# EAGLE board opemGBZ (EAGLE 9.1.0)
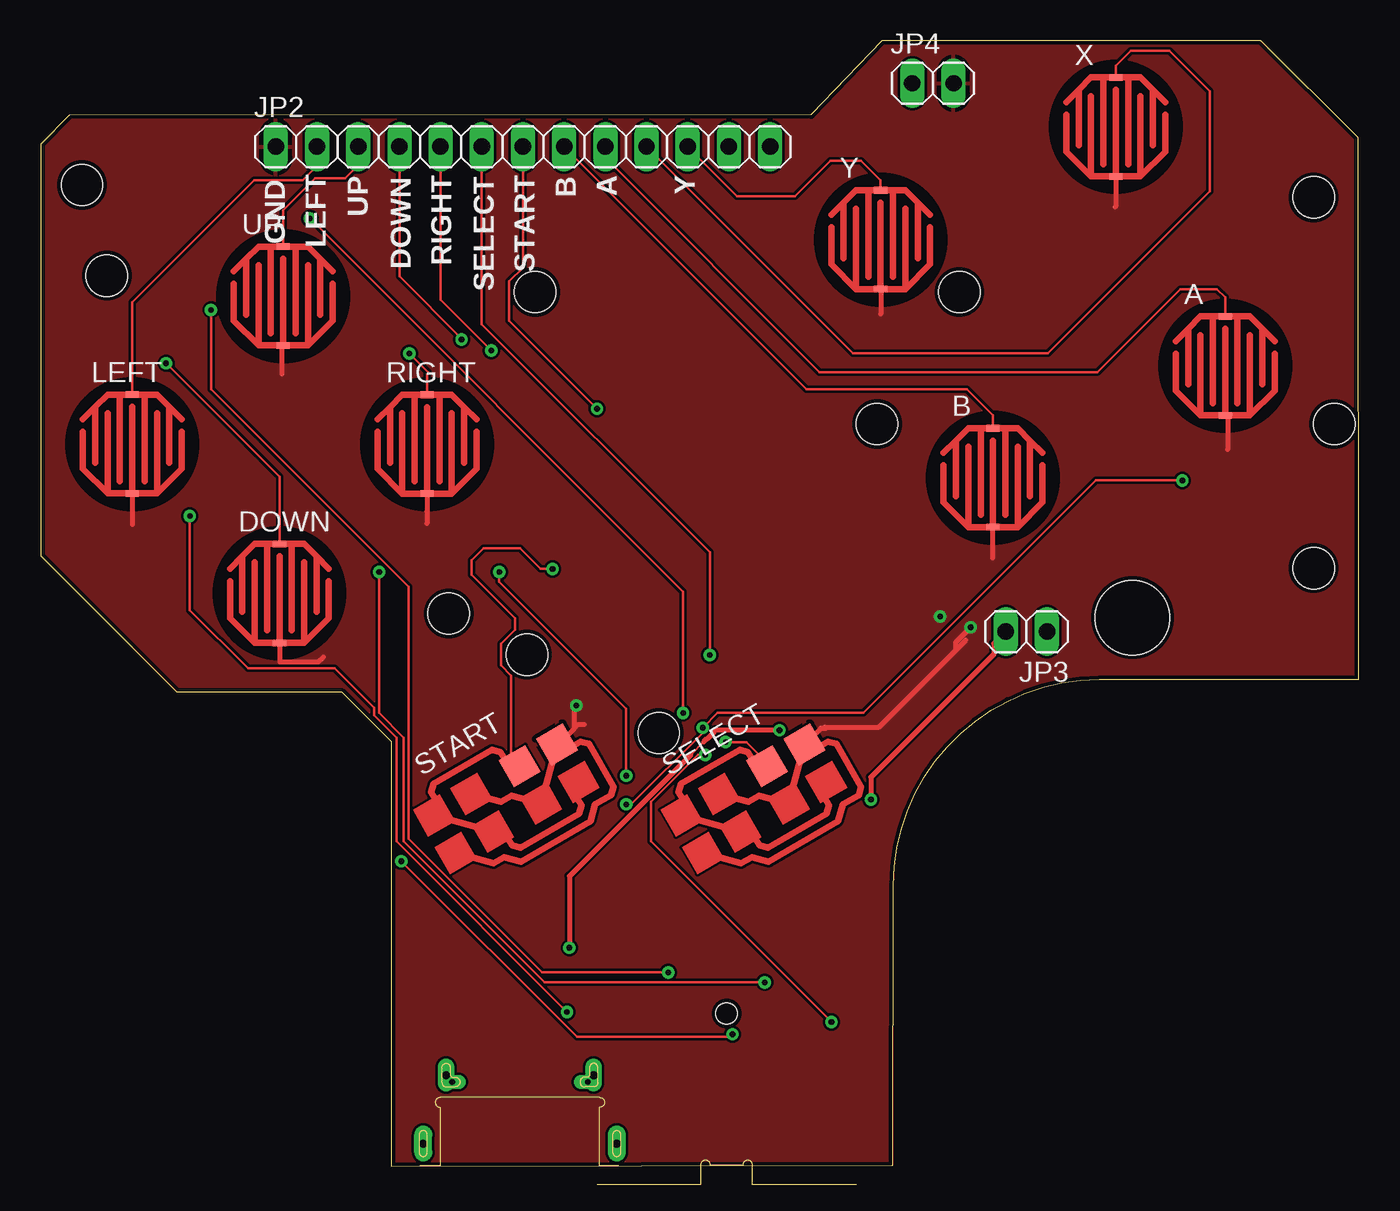
[diagram p0: board, top side]
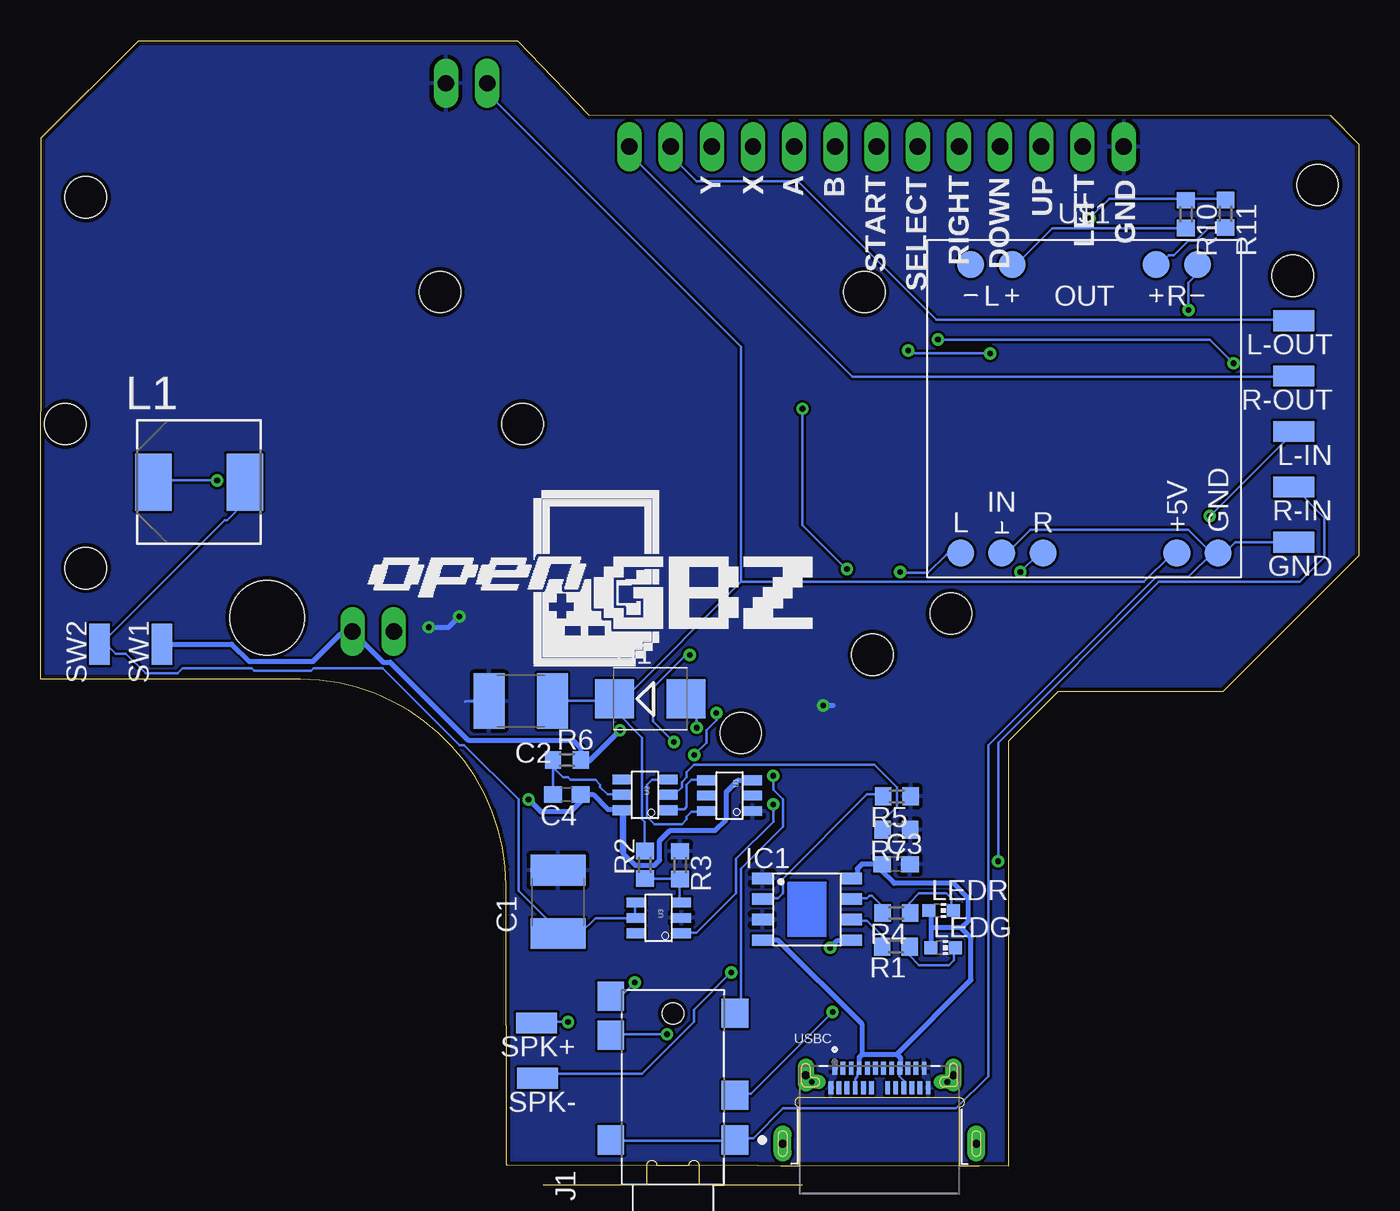
[diagram p1: board, bottom side, seen from below]

Size 81.3 x 69.38 mm. Coordinates in mm from the lower left corner, seen from the top.
Outline: 75.24,69.38 51.89,69.37 47.52,64.8 1.78,64.77 0,62.99 0.02,37.62 8.4,29.24 18.56,29.24 21.61,26.19 21.61,14.13 21.61,14.02 21.62,0 52.51,0.05 52.57,0.05 52.6,17.26 52.6,17.3 arc-90 65.3,30 81.3,30 81.26,63.03 81.26,63.05 81.26,63.3 81.26,63.3 81.26,63.36 81.25,63.37 81.25,63.37 75.24,69.38
Copper layers (1*16): Top 0.035mm / dielectric 1.5mm / Bottom 0.035mm
Design rules "default *": minimum track width 6mil, minimum drill 0.35mm, track to track 6mil, track to pad 6mil, pad to pad 6mil, via to via 6mil, smd to smd 6mil, copper to edge 10mil, drill to drill 6mil, minimum pad ring 10mil, minimum via ring 8mil, stop-mask expansion 4mil, vias tented up to drill 0mil, thermal gap 10mil
Holes 4.57 mm at 67.33,33.81
Holes 2.54 mm at 2.56,60.48 78.5,59.72 78.5,36.86 30.5,53.87 56.66,53.87 29.99,31.52 51.58,45.75 25.16,34.06 38.12,26.7 79.77,45.75 4.08,54.89

## Footprints (pad centres in the part's own frame; a part is rotated, then mirrored left to right if it is on the bottom)
DMG-BTN = smd 0.813 x 0.406: P$1 0,-3.048; P$2 0,3.048
C1812 = smd 1.9 x 3.4: 1 -1.95,0; 2 1.95,0
C0603 = smd 1.1 x 1: 1 -0.85,0; 2 0.85,0
SMB = smd 2.4 x 2.4: A 2.2,0; C -2.2,0
SMD1,27-2,54 = smd 1.27 x 2.54: 1 0,0
SOP-8 = smd 1.3 x 0.7: 1 -2.75,1.905; 2 -2.75,0.635; 3 -2.75,-0.635; 4 -2.75,-1.905; 5 2.75,-1.905; 6 2.75,-0.635; 7 2.75,0.635; 8 2.75,1.905
CUI_SJ2-35954D-SMT-TR = smd 1.8 x 1.65: 1 -3.25,-3.825; 2 3.2,3.825; 3 -0.5,-3.825; 4 -3.25,3.825; 10 5.6,3.825; 11 4.55,-3.825 | hole 1.3: 4.55,0
1X13 = drill 1.016 long: 1 -15.24,0; 2 -12.7,0; 3 -10.16,0; 4 -7.62,0; 5 -5.08,0; 6 -2.54,0; 7 0,0; 8 2.54,0; 9 5.08,0; 10 7.62,0; 11 10.16,0; 12 12.7,0; 13 15.24,0
1X02 = drill 1.016 long: 1 -1.27,0; 2 1.27,0
INDM7676X435N = smd 2.261 x 3.505: 1 -2.819,0; 2 2.819,0
CHIP-LED0603 = smd 0.8 x 0.8: A 0,-0.75; C 0,0.75
R0603 = smd 1 x 1.1: 1 -0.85,0; 2 0.85,0
DMG-SEL = smd 1.905 x 1.905: P$1 1.714,1.333; P$2 4.381,1.333
SOT23-6 = smd 0.6 x 1.2: 1 -0.95,-1.4; 2 0,-1.4; 3 0.95,-1.4; 4 0.95,1.4; 5 0,1.4; 6 -0.95,1.4
AMPLIFIER-PAM8403 = smd 1.676 x 1.676: +5V 5.715,-8.89; GND 8.255,-8.89; IN.COM -5.08,-8.89; IN.L -7.62,-8.89; IN.R -2.54,-8.89; OUT.L+ -4.445,8.89; OUT.L- -6.985,8.89; OUT.R+ 4.445,8.89; OUT.R- 6.985,8.89
TE_1-2295018-2 = smd 0.3 x 0.8: A1 -2.75,4.63; A2 -2.25,4.63; A3 -1.75,4.63; A4 -1.25,4.63; A5 -0.75,4.63; A6 -0.25,4.63; A7 0.25,4.63; A8 0.75,4.63; A9 1.25,4.63; A10 1.75,4.63; A11 2.25,4.63; A12 2.75,4.63; B1 3,3.43; B2 2.5,3.43; B3 2,3.43; B4 1.5,3.43; B5 1,3.43; B6 0.5,3.43; B7 -0.5,3.43; B8 -1,3.43; B9 -1.5,3.43; B10 -2,3.43; B11 -2.5,3.43; B12 -3,3.43 | drill 0.5 long: P1_1 -4.55,4.22; P2_1 4.55,4.22 | drill 0.35 long: P1_2 -4.191,3.795; P2_2 4.191,3.795 | drill 0.5 pad 1.1 long: P4 -5.97,0; P5 5.97,0

## Placement (x,y rotation side)
A  DMG-BTN  [DMG-BTN]  73.05,49.32 0 top
B  DMG-BTN  [DMG-BTN]  58.73,42.43 0 top
C1  22uF  [C1812]  49.4,16.28 90 bottom
C2  22uF  [C1812]  51.68,28.67 180 bottom
C3  10u  [C0603]  28.55,18.61 0 bottom
C4  0.1uF  [C0603]  48.85,22.91 180 bottom
D1  [SMB]  43.7,28.8 0 bottom
DOWN  DMG-BTN  [DMG-BTN]  14.73,35.3 0 top
GND  [SMD1,27-2,54]  4.02,38.45 90 bottom
IC1  TP4056  [SOP-8]  34.03,15.83 0 bottom
J1  SJ2-35954D-SMT-TR  [CUI_SJ2-35954D-SMT-TR]  42.3,4.86 90 bottom
JP2  [1X13]  29.75,62.84 0 top
JP3  [1X02]  60.8,32.94 180 top
JP4  [1X02]  55.02,66.75 0 top
L1  DR74-220-R  [INDM7676X435N]  71.52,42.16 0 bottom
L-IN  [SMD1,27-2,54]  4.02,45.28 90 bottom
L-OUT  [SMD1,27-2,54]  4.02,52.11 90 bottom
LEDG  [CHIP-LED0603]  25.64,13.47 270 bottom
LEDR  [CHIP-LED0603]  25.76,15.75 270 bottom
LEFT  DMG-BTN  [DMG-BTN]  5.66,44.51 0 top
R1  1k  [R0603]  28.55,13.53 180 bottom
R2  [R0603]  44.03,18.58 90 bottom
R3  [R0603]  41.86,18.55 270 bottom
R4  1k  [R0603]  28.52,15.6 180 bottom
R5  2k  [R0603]  28.49,22.79 180 bottom
R6  100  [R0603]  48.84,25.03 0 bottom
R7  2k  [R0603]  28.52,20.72 180 bottom
R10  16  [R0603]  10.67,58.68 270 bottom
R11  16  [R0603]  8.23,58.7 270 bottom
R-IN  [SMD1,27-2,54]  4.02,41.87 90 bottom
R-OUT  [SMD1,27-2,54]  4.02,48.69 90 bottom
RIGHT  DMG-BTN  [DMG-BTN]  23.83,44.5 0 top
SELECT  DMG-BTN  [DMG-SEL]  43.98,22.64 30 top
SPK+  [SMD1,27-2,54]  50.72,8.82 90 bottom
SPK-  [SMD1,27-2,54]  50.66,5.41 90 bottom
START  DMG-BTN  [DMG-SEL]  28.72,22.64 30 top
SW1  [SMD1,27-2,54]  73.82,32.17 0 bottom
SW2  [SMD1,27-2,54]  77.66,32.17 0 bottom
U1  FS8205  [SOT23-6]  38.81,22.84 270 bottom
U2  FS312F-G  [SOT23-6]  44.03,22.89 90 bottom
U3  MT3608  [SOT23-6]  43.18,15.3 90 bottom
U$1  AMPLIFIER-PAM8403  [AMPLIFIER-PAM8403]  16.95,46.68 0 bottom
UP  DMG-BTN  [DMG-BTN]  14.96,53.63 0 top
USBC  1-2295018-2  [TE_1-2295018-2]  29.56,1.39 0 bottom
X  DMG-BTN  [DMG-BTN]  66.3,64.05 0 top
Y  DMG-BTN  [DMG-BTN]  51.8,57.11 0 top

## Library data of the parts
A B DOWN LEFT RIGHT SELECT START UP X Y = Game Boy
C1-C4 = rcl; SPICEPREFIX: C
D1 = diode
GND L-IN L-OUT R-IN R-OUT SPK+ SPK- SW1 SW2 = wirepad
IC1 = TP4056
J1 = SJ2-35954D-SMT-TR; AVAILABILITY: Good; DESCRIPTION: 4 conductors, 3.5mm, SMT Audio Jack w/ 2 Switch; MF: CUI; MP: SJ2-35954D-SMT-TR; PACKAGE: None; PRICE: 0.94 USD
JP2-JP4 = pinhead
L1 = DR74-220-R; AVAILABILITY: Good; DESCRIPTION: Inductor Power Shielded Drum Core 21.73uH/22uH 20% 100KHz Ferrite 1.75A 92.5mOhm DCR T/R; MF: Eaton; MP: DR74-220-R; PACKAGE: Nonstandard Eaton; PRICE: 0.98 USD
LEDG LEDR = led
R1-R7 R10 R11 = rcl; SPICEPREFIX: R
U1 = fs8205
U2 = fs321f-g
U3 = mt3608
U$1 = diy-modules
USBC = 1-2295018-2; AVAILABILITY: Good; CENTERLINE_PITCH: .5 mm[.019 in]; COMMENT: 1-2295018-2; DESCRIPTION: USB TYPE C, REC OFFSET 0.65MM DUAL SMT; MF: TE Connectivity; MP: 1-2295018-2; NUMBER_OF_POSITIONS: 24; PACKAGE: None; PRICE: 1.82 USD; PRODUCT_TYPE: Connector

## Nets
5V: C2.1 D1.C JP4.1 R2.2 U$1.+5V
BAT+: IC1.5 JP3.1 R6.2 SW1.1
BAT-: C4.1 JP3.2 U1.6 U2.6
GND: A.P$1 B.P$1 C1.2 C2.2 C3.2 DOWN.P$1 IC1.1 IC1.3 JP2.1 JP4.2 LEFT.P$1 R3.1 R5.1 R7.1 RIGHT.P$1 SELECT.P$2 START.P$2 U1.4 U3.2 UP.P$1 USBC.A1 USBC.A12 USBC.B1 USBC.B12 X.P$1 Y.P$1
L-OUT: JP2.12 L-OUT.1
N$1: JP2.2 LEFT.P$2
N$2: JP2.3 UP.P$2
N$3: DOWN.P$2 JP2.4
N$4: JP2.5 RIGHT.P$2
N$5: JP2.6 SELECT.P$1
N$6: JP2.7 START.P$1
N$7: B.P$2 JP2.8
N$8: A.P$2 JP2.9
N$9: JP2.10 X.P$2
N$10: JP2.11 Y.P$2
N$11: IC1.6 R1.2
N$12: IC1.7 R4.2
N$13: LEDG.C R1.1
N$14: LEDR.C R4.1
N$15: IC1.2 R5.2
N$16: U1.3 U2.3
N$17: U1.1 U2.1
N$18: R7.2 U2.2
N$19: D1.A L1.1 U3.1
N$20: R2.1 R3.2 U3.3
N$21: R11.2 U$1.OUT.R+
N$22: GND.1 J1.1 J1.4 U$1.GND U$1.IN.COM
N$23: J1.11 U$1.IN.L
N$24: J1.10 U$1.IN.R
N$25: J1.2 R-IN.1
N$26: J1.3 L-IN.1
N$27: R10.2 U$1.OUT.L+
N$28: R10.1 R11.1 SPK+.1
N$29: SPK-.1 U$1.OUT.R-
N$30: C4.2 R6.1 U2.5
N$31: C1.1 L1.2 SW2.1 U3.4 U3.5
R-OUT: JP2.13 R-OUT.1
VBUS: C3.1 IC1.4 IC1.8 LEDG.A LEDR.A USBC.A4 USBC.A9 USBC.B4 USBC.B9

## Tracks (layer width: path | path; a pad name or v marks a point on that pad's centre or on a via)
5V
  Bottom 0.152: R2.2 44.04,19.55 44.04,21.23 44.19,21.38 44.19,26.41 45.87,28.09 45.87,28.7 D1.C | 38.1,36.01 13.26,36.01 11.58,37.69 11.28,37.69 U$1.+5V | 38.1,36.01 45.26,28.85 45.87,28.85 D1.C | 38.1,36.01 38.1,50.49 53.64,66.04 53.64,66.64 JP4.1 | C2.1 49.68,28.7 46.02,28.7 D1.C
BAT+  (via drill 0.35)
  Top 0.152: v32.61,13.46 32.61,17.88 40.09,25.36 40.89,26.15
  Top 0.305: v45.57,26.87 41.6,26.87 41.52,26.79 41.52,26.74 41.12,26.34 41.07,26.34 40.89,26.15 | 40.09,25.36 32.61,17.88 v32.61,13.46
  Bottom 0.152: 48,25.04 R6.2 47.92,24.96 | 31.39,13.91 IC1.5 | 62.79,32.81 62.18,32.81 JP3.1
  Bottom 0.305: SW1.1 69.5,32.17 68.44,31.12 64.48,31.12 62.79,32.81 | JP3.1 60.18,31.06 59.73,31.06 54.93,26.26 48.46,26.26 48,25.8 48,25.04 | v45.57,26.87 47.47,24.96 47.92,24.96 | v32.61,13.46 32.15,13.91 31.39,13.91
BAT-  (via drill 0.35)
  Top 0.305: JP3.2 58.78,32.2 58.78,31.55 51.2,23.97 v51.2,22.6
  Bottom 0.152: 46.33,21.99 45.57,21.99 U2.6 45.41,21.99 45.26,21.84 45.26,19.25 44.5,18.49 43.58,18.49 43.13,18.94 43.13,20.04
  Bottom 0.305: v51.2,22.6 50.44,21.84 48.61,21.84 48,22.46 C4.1 47.24,22.91 46.33,21.99 45.41,21.99 | U2.6 45.43,19.35 44.62,18.53 43.45,18.53 43.13,18.85 43.13,20.04 42.47,20.7 39.7,20.7 39.01,21.38 39.01,23.06 38.29,23.78 U1.6
GND  (via drill 0.35 pad 0.75)
  Top 0.305: DOWN.P$1 14.75,32.23 14.75,31.07 17.13,31.07 17.43,31.38 | RIGHT.P$1 23.83,40.34 23.83,39.61 | 23.83,39.61 | LEFT.P$1 5.66,39.56 5.67,39.55 | B.P$1 58.7,39.36 58.7,37.48 | A.P$1 73.21,46.11 73.21,44.18 | Y.P$1 51.81,52.53 | X.P$1 66.3,59.16 66.26,59.12 | UP.P$1 14.87,50.49 14.87,48.81 | SELECT.P$2 48.11,26.99 48.28,26.99 | 48.28,26.99 48.46,26.99 | 32.91,26.99 31.91,25.99 START.P$2 | 32.91,26.99 33.16,27.23 33.53,27.23 | 48.28,26.99 48.34,27.05 51.69,27.05 56.42,31.78 | 56.42,31.78 56.69,32.05 57.06,32.42 | v57.36,33.21 56.42,32.26 56.42,31.78 | 32.91,26.99 32.91,28.27 33.16,28.51 v33.04,28.39 | v33.04,28.39
  Bottom 0.152: C2.2 55.08,28.67 55.11,28.64
  Bottom 0.305: v57.36,33.21 56.14,33.21 v55.47,33.88 | v33.04,28.39 32.43,28.39
  pour Bottom: -3.72,73.26 76.81,73.26 86.81,63.26 86.81,12.36 67.05,-7.39 20.24,-7.39 12.13,0.72 12.13,16.14 -3.78,32.05 -3.78,73.26
  pour Top: 41.27,-5.99 63.58,-5.99 84.61,15.04 84.61,62.47 75.53,71.55 0.24,71.55 -2.26,69.05 -2.26,35.16 16.52,16.38 16.52,-0.44 22.19,-6.11 41.15,-6.11
L-OUT
  Bottom 0.152: L-OUT.1 4.11,52.17 26.06,52.17 34.59,60.7 40.84,60.7 42.37,62.23 42.37,62.83 JP2.12
N$1
  Top 0.152: LEFT.P$2 5.66,53.25 13.17,60.76 16.15,60.76 17.05,61.66 JP2.2
N$2
  Top 0.152: UP.P$2 14.96,58.9 16.95,60.88 18.77,60.88 19.59,61.7 JP2.3
N$3  (via drill 0.35 pad 0.75)
  Top 0.152: DOWN.P$2 14.73,42.49 v7.74,49.48 | JP2.4 22.13,54.85 26.03,50.95 v25.97,50.95
  Bottom 0.152: v25.97,50.95 9.2,50.95 v7.74,49.48
N$4  (via drill 0.35 pad 0.75)
  Top 0.152: JP2.5 24.67,53.41 v27.8,50.28 | v27.8,50.28 27.86,50.22 v27.8,50.28 | v22.74,50.09 23.89,48.94 23.89,48.88 23.83,48.81 RIGHT.P$2
  Bottom 0.152: v27.8,50.28 27.61,50.09 v22.74,50.09
N$5  (via drill 0.35 pad 0.75)
  Top 0.152: JP2.6 27.21,51.9 41.27,37.84 v41.27,31.5 | SELECT.P$1 44.8,24.86 43.52,26.14 v42.24,26.14
  Bottom 0.152: v42.24,26.14 43.52,27.42 43.52,29.49 41.52,31.5 v41.27,31.5
N$6  (via drill 0.35 pad 0.75)
  Top 0.152: JP2.7 29.75,55.38 28.9,54.54 28.9,52.1 v34.32,46.68 | v34.32,46.68 34.38,46.62 v34.32,46.68 | v31.58,36.8 30.84,36.8 29.56,38.09 27.31,38.09 26.58,37.35 26.58,36.44 29.26,33.76 29.26,33.05 28.39,32.18 28.39,30.86 29.02,30.23 29.02,25.18 START.P$1
  Bottom 0.152: v34.32,46.68 34.32,39.49 31.64,36.8 v31.58,36.8
N$7
  Top 0.152: JP2.8 47.22,47.9 57.12,47.9 58.73,46.28 B.P$2
N$8
  Top 0.152: JP2.9 34.83,62.14 48.03,48.94 65.16,48.94 70.29,54.06 72.54,54.06 73.05,53.55 A.P$2
N$9
  Top 0.152: JP2.10 50.11,50.09 62.12,50.09 72.11,60.09 72.11,66.25 69.61,68.75 67.24,68.75 66.3,67.81 X.P$2
N$10
  Top 0.152: JP2.11 42.95,59.79 46.51,59.79 48.71,61.98 50.6,61.98 51.8,60.77 Y.P$2
N$11
  Bottom 0.152: R1.2 29.41,13.61 29.41,14.22 30.33,15.13 31.24,15.13 IC1.6
N$12
  Bottom 0.152: R4.2 29.41,15.74 29.41,16.05 30.02,16.66 30.17,16.66 30.33,16.51 31.24,16.51 IC1.7
N$13
  Bottom 0.152: LEDG.C 24.99,13.46 24.99,12.7 25.3,12.39 27.13,12.39 27.74,13 27.74,13.46 R1.1
N$14
  Bottom 0.152: LEDR.C 25.14,15.9 25.14,16.51 25.45,16.81 27.13,16.81 27.74,16.2 27.74,15.74 R4.1
N$15
  Bottom 0.152: R5.2 29.41,22.91 30.33,22.91 35.51,17.72 35.51,16.81 35.81,16.51 36.73,16.51 IC1.2
N$16
  Bottom 0.152: U1.3 40.23,21.84 41.15,21.84 41.45,21.53 41.45,21.38 41.76,21.08 43.43,21.08 43.89,21.53 43.89,23.52 43.58,23.82 42.67,23.82 U2.3
N$17
  Bottom 0.152: U2.1 42.52,21.99 41.6,21.99 41.45,22.14 41.45,23.52 41.15,23.82 40.23,23.82 U1.1
N$18
  Bottom 0.152: R7.2 29.26,20.77 29.26,21.38 28.5,22.14 28.5,23.36 29.87,24.73 40.99,24.73 41.45,24.28 41.45,23.97 41.76,23.67 41.76,23.36 42.21,22.91 42.52,22.91 U2.2
N$19  (via drill 0.35)
  Top 0.152: v36.12,22.3 36.42,22.3 40.84,26.72 v40.84,27.02 41.76,27.94 50.75,27.94 65.07,42.26 v70.41,42.26
  Bottom 0.152: v36.12,22.3 36.12,21.23 38.4,18.94 38.4,16.81 40.84,14.37 41.76,14.37 U3.1 | v40.84,27.02 40.84,28.09 41.45,28.7 D1.A | v70.41,42.26 74.22,42.26 L1.1
N$20
  Bottom 0.152: U3.3 41.91,16.35 41.91,17.57 R3.2 41.91,17.72 43.89,17.72 R2.1
N$21
  Bottom 0.152: R11.2 8.23,57.81 9.29,57.81 10.06,57.04 10.51,57.04 11.43,56.13 11.73,56.13 12.19,55.67 12.5,55.67 U$1.OUT.R+
N$22
  Bottom 0.152: J1.4 46.02,1.57 38.56,1.57 J1.1 38.4,1.72 37.34,1.72 35.51,3.55 24.84,3.55 22.86,5.53 22.86,25.95 17.43,31.38 12.5,36.32 10.51,36.32 8.99,37.84 | U$1.GND 8.69,37.84 8.23,37.84 7.62,38.45 4.11,38.45 GND.1 | 8.99,37.84 8.84,37.84 U$1.GND | 8.99,37.84 9.14,37.84 10.51,39.21 20.27,39.21 21.64,37.84 21.94,37.84 U$1.IN.COM | 8.99,37.84 U$1.GND
N$23  (via drill 0.35)
  Top 0.152: v36.12,24.06 36.12,28.18 28.28,36.01 v28.28,36.62
  Bottom 0.152: v36.12,24.06 36.12,23.21 35.51,22.6 35.51,20.92 38.1,18.33 38.1,9.8 38.4,9.49 J1.11 | U$1.IN.L 24.69,37.69 25.45,37.69 26.58,36.56 28.22,36.56 v28.28,36.62
N$24  (via drill 0.35)
  Top 0.152: v20.88,36.62 20.88,27.94 22.4,26.41 22.4,20.01 31.09,11.32 v44.65,11.32
  Bottom 0.152: v20.88,36.62 19.81,37.69 19.51,37.69 U$1.IN.R | v44.65,11.32 45.41,10.56 46.02,10.56 J1.10
N$25  (via drill 0.35)
  Top 0.152: v42.67,8.12 42.52,7.97 33.07,7.97 v22.25,18.79
  Bottom 0.152: v42.67,8.12 46.02,8.12 J1.2 | v22.25,18.79 22.25,26.11 12.34,36.01 3.66,36.01 2.13,37.54 2.13,39.97 3.96,41.8 R-IN.1
N$26  (via drill 0.35)
  Top 0.152: v32.46,9.49 21.94,20.01 21.94,26.41 20.57,27.78 20.57,28.24 18.13,30.68 12.8,30.68 9.2,34.28 v9.2,40.07
  Bottom 0.152: v32.46,9.49 37.49,4.47 38.4,4.47 J1.3 | v9.2,40.07 4.11,45.16 L-IN.1
N$27
  Bottom 0.152: R10.2 10.67,57.81 18.9,57.81 21.03,55.67 21.33,55.67 U$1.OUT.L+
N$28  (via drill 0.35)
  Top 0.152: v16.61,58.42 39.62,35.4 v39.62,27.94 | v40.99,25.34 40.54,25.34 37.64,22.45 37.64,20.01 v48.77,8.89
  Bottom 0.152: 10.67,59.63 8.23,59.63 R11.1 | 10.67,59.63 R10.1 10.67,59.63 | 10.67,59.63 15.39,59.63 v16.61,58.42 | v39.62,27.94 39.62,27.48 40.23,26.87 40.23,26.11 v40.99,25.34 | v48.77,8.89 50.6,8.89 SPK+.1
N$29  (via drill 0.35)
  Top 0.152: v10.51,52.78 10.51,47.9 22.71,35.71 22.71,20.16 30.94,11.93 v38.71,11.93
  Bottom 0.152: v10.51,52.78 10.51,54.45 10.06,54.91 10.06,55.52 U$1.OUT.R- | v38.71,11.93 40.99,9.65 40.99,8.89 44.19,5.68 50.44,5.68 50.6,5.53 SPK-.1
N$30
  Bottom 0.152: 49.68,24.73 49.68,24.89 R6.1 49.68,24.73 | 49.68,24.73 49.68,22.91 C4.2 | 49.68,24.73 49.53,24.58 49.53,24.43 49.07,23.97 48.77,23.97 48.61,23.82 47.09,23.82 46.79,23.52 46.79,23.36 46.33,22.91 45.57,22.91 U2.5
N$31
  Bottom 0.152: U3.4 44.65,16.2 44.65,15.44 U3.5 44.65,15.29 47.09,15.29 48,14.37 49.38,14.37 C1.1 49.53,14.37 49.53,14.68 51.81,16.96 51.81,22.6 55.17,25.95 55.47,25.95 60.2,30.68 64.46,30.68 64.62,30.53 68.12,30.53 68.27,30.68 72.54,30.68 72.85,30.37 74.83,30.37 76.05,31.59 76.66,31.59 77.42,32.35 | 77.42,32.35 69.95,39.82 69.8,39.82 68.73,40.89 68.73,42.11 L1.2 | 77.42,32.35 77.57,32.2 SW2.1 77.42,32.35
R-OUT
  Bottom 0.152: R-OUT.1 4.11,48.66 31.24,48.66 44.96,62.38 44.96,62.83 JP2.13
VBUS
  Bottom 0.152: 26.36,15.74 LEDR.A | 30.94,17.88 31.09,17.72 31.24,17.72 IC1.8 | 26.36,14.68 24.53,14.68 23.93,14.07 | 28.65,17.42 28.71,17.48 | 29.41,18.49 C3.1 | USBC.B4 28.04,4.89 28.04,5.23 28.34,5.53 28.34,5.84 28.34,5.96 USBC.A9 28.34,6.11 28.34,6.29 | 31.09,5.08 31.09,4.89 USBC.B9 31.06,5.39 30.94,5.52 30.94,5.81 30.78,5.96 USBC.A4 | 30.63,6.9 28.5,6.9 | 36.73,13.91 IC1.4
  Bottom 0.305: USBC.A4 30.81,6.72 30.63,6.9 | 30.63,6.9 28.5,6.9 | 28.5,6.9 28.27,6.68 28.27,6.19 28.34,6.11 | 28.27,5.91 28.34,5.84 | 30.63,6.9 30.63,8.73 35.81,13.91 36.73,13.91 | 28.5,6.9 23.93,11.48 23.93,14.07 24.53,14.68 | 24.53,14.68 26.36,14.68 | 26.36,14.68 26.39,14.65 LEDG.A | 26.36,14.68 26.36,15.74 | 24.53,14.68 24.08,15.13 24.08,16.51 24.99,17.42 28.65,17.42 | 28.71,17.48 29.41,18.18 29.41,18.49 | C3.1 30.66,18.61 30.94,18.33 30.94,17.88

## Text on the board
tNames: LEFT | UP | DOWN | RIGHT | SELECT | START | B | A | Y | GND
bNames: LEFT | UP | DOWN | RIGHT | SELECT | START | B | A | X | X | Y | GND